# Altium PCB USBC.PcbDoc
Units mil, origin at the board's own origin, x right, y up, seen from the top; angles counter-clockwise.
Board outline 6000 x 4000 mil, 2 copper layers (Top Layer, Bottom Layer); 7 components, 7 nets, 45 pads, 0 vias.
Unrouted connection lines stored in the file: 16.
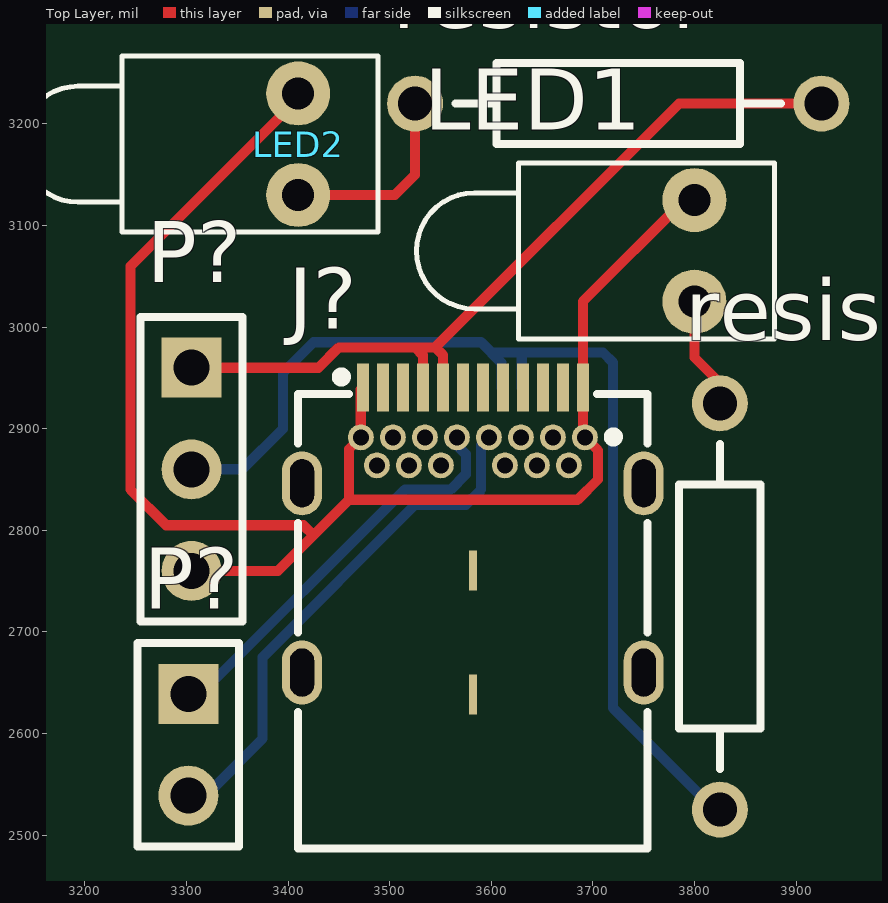
[diagram p0: Top Layer view]
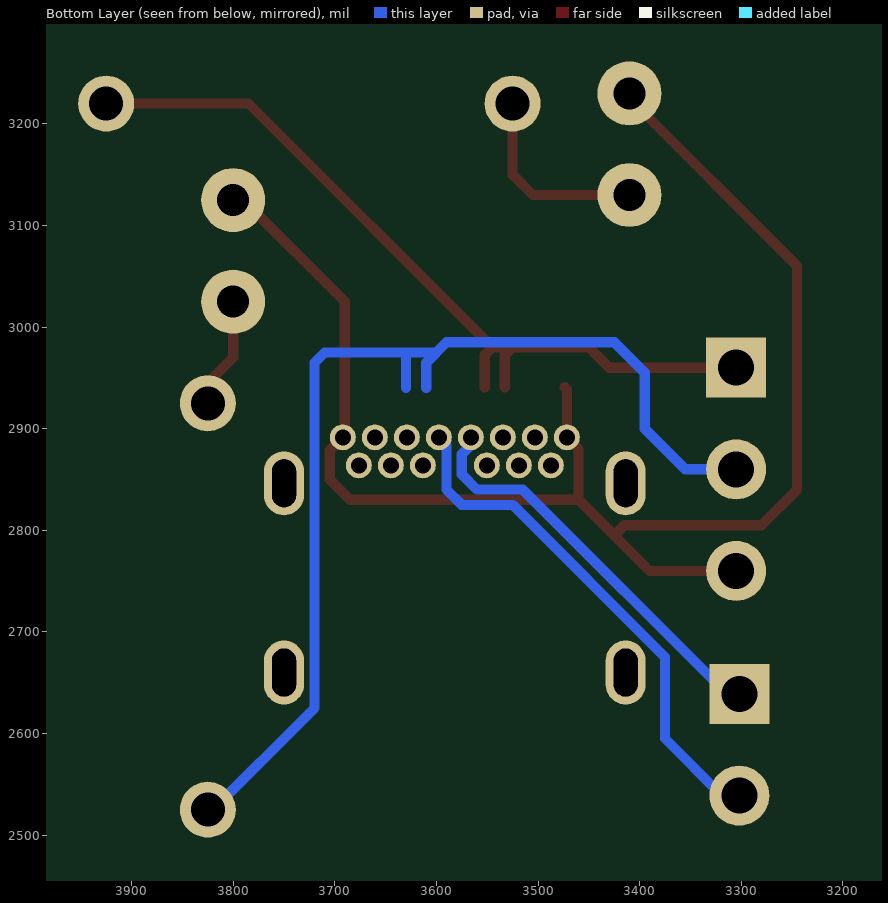
[diagram p1: Bottom Layer view, seen from below]

## Layer stack, top to bottom
Top Solder: solder mask 0.4, Solder Resist, Dk 3.5
Top Layer: signal copper 1.4
Dielectric 1: dielectric 12.6, FR-4, Dk 4.8
Bottom Layer: signal copper 1.4
Bottom Solder: solder mask 0.4, Solder Resist, Dk 3.5

## Board outline
1000,1000 7000,1000 7000,5000 1000,5000

## Design rules (kind name [scope] priority, off if disabled: settings)
Clearance [All] p1: gap=10 ignorepadtopadclearanceinfootprint=FALSE except(0: Arc-Hole Track-Hole SMDPad-Hole THPad-Hole Via-Hole Fill-Hole Poly-Hole Region-Hole Text-Hole)
PolygonConnect [All] p1: connectstyle=Relief reliefconductorwidth=10 reliefentries=4 polygonreliefangle="90 Angle" airgapwidth=10
RoomDefinition USBC [InComponentClass('USBC')] p1: confinementstyle=ConfineIn formatcopy=TRUE lockcomponents=FALSE outline 3110,2473.86 3975,2473.86 3975,3295 3110,3295
RoutingVias [All] p1: holewidth=28 width=50 viastyle="Through Hole" minholewidth=28 minwidth=50 maxholewidth=28 maxwidth=50
SolderMaskExpansion [All] p1: expansion=4
Width [All] p1: maxlimit=10 minlimit=10 preferedwidth=10
30 further rules are at their usual default settings.

## Classes and differential pairs
component class USBC: J? LED1 LED2 P? resistor resistor2

## Components (designator, comment, footprint, x,y, rotation, side; value= is the part's Value field where it differs from the comment)
J? "632723100011" 632723100011 3581.89,2718.86 r0 top
LED1 "LED1" LED-1 3800,3075 r180 top
LED2 "LED2" LED-1 3410,3180 r180 top
P? "Header 3" HDR1X3 3305,2960 r270 top
P? "Header 2" HDR1X2 3301.89,2638.86 r270 top
resistor "Res2" AXIAL-0.4 3725,3220 r180 top value=680
resistor2 "Res2" AXIAL-0.4 3825,2725 r90 top value=150

## Footprints (in the part's own frame and the unit in brackets; to place one, negate y for a bottom-side part, rotate by r counter-clockwise, add the part's x,y. Pads: shape width x height; smd on the part's side, far side on the other; paste and mask are expansions set on the pad)
632723100011 [mm] "USB 3.1 Type C Receptacle Horizontal THR"
  rect 0.3x1.2 smd: A1(-2.75,5.635) A2(-2.25,5.635) A3(-1.75,5.635) A4(-1.25,5.635) A5(-0.75,5.635) A6(-0.25,5.635) A7(0.25,5.635) A8(0.75,5.635) A9(1.25,5.635) A10(1.75,5.635) A11(2.25,5.635) A12(2.75,5.635)
  round 0.65 hole 0.4: B1(2.8,4.385) B2(2.4,3.685) B3(1.6,3.685) B4(1.2,4.385) B5(0.8,3.685) B6(0.4,4.385) B7(-0.4,4.385) B8(-0.8,3.685) B9(-1.2,4.385) B10(-1.6,3.685) B11(-2.4,3.685) B12(-2.8,4.385) Shell(-2,4.385) Shell(2,4.385)
  oval 1x1.6 hole 0.6 slot 1.2 at 90 deg: Shell(-4.27,-1.495) Shell(-4.27,3.235) Shell(4.27,-1.495) Shell(4.27,3.235)
  rect 0.2x1 smd: ""(0,-2.045) ""(0,1.055)
  silkscreen extent -4.37,-5.89 4.37,6.01, body extent -4.37,-5.89 4.37,5.9, height 3.05
AXIAL-0.4 [mm] "Axial Device, Thru-Hole; 2 Leads; 0.4 in Pin Spacing"
  round 1.4 hole 0.85: 1(-5.08,0) 2(5.08,0)
  silkscreen extent -4.06,-1.02 4.06,1.02
HDR1X2 [mm] "Connector; Header; 2 Position"
  rect 1.5x1.5 hole 0.9: 1(0,0)
  round 1.5 hole 0.9: 2(2.54,0)
  silkscreen extent -1.27,-1.27 3.81,1.27
HDR1X3 [mm] "Connector; Header; 3 Position"
  rect 1.5x1.5 hole 0.9: 1(0,0)
  round 1.5 hole 0.9: 2(2.54,0) 3(5.08,0)
  silkscreen extent -1.27,-1.27 6.35,1.27
LED-1 [mm] "LED; 2 Leads"
  round 1.6 hole 0.8: 1(0,1.27) 2(0,-1.27)
  silkscreen extent -2,-2.2 6.95,2.2

## Part data
J?: "USB 3.1 Type C Receptacle Horizontal THR WR-COM", ComponentLink1Description=Manufacturer, ComponentLink1URL=http://www.we-online.de, ComponentLink2Description=Datasheet, ComponentLink2URL=http://katalog.we-online.de/em/datasheet/632723x00011.pdf, Construction=THR, Gender=Receptacle, Interface Type="Type C", Part Number=632723100011, Published Date="April 2017", Publisher="Wurth Elektronik", Sub-Family="USB 3.1", Type=Horizontal
LED1: "Typical RED GaAs LED", LatestRevisionDate=08-Jul-2005, LatestRevisionNote="Mech Layer 1 removed.", PackageDescription="LED; 2 Leads", PackageReference=LED-1, Published=8-Jun-2000, Publisher="Altium Limited"
LED2: library part LED1, "Typical RED GaAs LED", LatestRevisionDate=08-Jul-2005, LatestRevisionNote="Mech Layer 1 removed.", PackageDescription="LED; 2 Leads", PackageReference=LED-1, Published=8-Jun-2000, Publisher="Altium Limited"
P?: "Header, 3-Pin", LatestRevisionDate=17-Jul-2002, LatestRevisionNote="Re-released for DXP Platform.", Publisher="Altium Limited"
P?: "Header, 2-Pin", LatestRevisionDate=17-Jul-2002, LatestRevisionNote="Re-released for DXP Platform.", Publisher="Altium Limited"
resistor resistor2: "Resistor", LatestRevisionDate=17-Jul-2002, LatestRevisionNote="Re-released for DXP Platform.", PackageDescription="Axial Device, Thru-Hole; 2 Leads; 0.4 in Pin Spacing", PackageReference=AXIAL-0.4, Published=8-Jun-2000, Publisher="Altium Limited"

## Nets (pads, with @x,y where several pads share a name; then routed paths per layer and width w, separated by ;. In a path a pad name is that pad's centre, name@x,y a point inside that pad or via, vN(x,y) a via of type N, cw(c..) or ccw(c..) an arc to the next point about the centre after c; other vN are vias at no path point)
+5: J?.A8 J?.A9 P?.2@3305,2860 resistor2.1
+12: J?.A4 J?.A5 P?.1@3305,2960 resistor.1
CAN_H: J?.B7 P?.1@3301.89,2638.86
CAN_L: J?.B6 P?.2@3301.89,2538.86
GND: J?.A1 J?.A12 J?.B1 J?.B12 LED1.2 LED2.2 P?.3
NetLED1_1: LED1.1 resistor2.2
NetLED2_1: LED2.1 resistor.2
pads on no net: J?. J?.A2 J?.A3 J?.A6 J?.A7 J?.A10 J?.A11 J?.B2 J?.B3 J?.B4 J?.B5 J?.B8 J?.B9 J?.B10 J?.B11 J?.Shell
copper on no net: | length 4672.5
  Top Layer w10: 3305,2760 3390,2760 3460,2830 ; 3305,2960 3430,2960 3450,2980 3525,2980 ; 3410,3130 3505,3130 3525,3150 3525,3220 ; 3410,3230 3410,3225 3245,3060 3245,2840 3280,2805 3415,2805 3425,2795 ; 3473.62,2940.71 3471.5,2938.58 3471.5,2891.5 3460,2880 3460,2830 ; 3532.68,2940.71 3532.68,2972.32 3525,2980 ; 3552.36,2940.71 3552.36,2972.64 3545,2980 ; 3800,3025 3800,2970 3835,2935 3835,2920 ; 3800,3125 3790,3125 3690.16,3025.16 3690.16,2940.71 3690.16,2893.46 3705,2878.62 3705,2850 3685,2830 3460,2830 ; 3910,3220 3785,3220 3545,2980 ; 3525,2980 3545,2980
  Bottom Layer w10: 3301.89,2538.86 3318.86,2538.86 3375,2595 3375,2675 3525,2825 3575,2825 3590,2840 3590,2883.86 3597.64,2891.5 ; 3305,2860 3355,2860 3395,2900 3395,2955 3425,2985 3590,2985 3610,2965 3610,2940 ; 3323.86,2638.86 3301.89,2638.86 3313.86,2638.86 3515,2840 3560,2840 3575,2855 3575,2875 3566.14,2883.86 3566.14,2891.5 ; 3600,2975 3630,2975 ; 3630,2940 3630,2975 ; 3835,2520 3825,2520 3720,2625 3720,2965 3710,2975 3630,2975